# Altium PCB WS_LORA.PcbDoc (part 2 of 2)
Units mm, origin at the board's own origin, x right, y up, seen from the top; angles counter-clockwise.
Board outline 77.7 x 51.7 mm, 2 copper layers (Top Layer, Top, Bottom Layer, Bottom), stack 1.571 mm thick; 79 components, 51 nets, 236 pads, 108 vias.
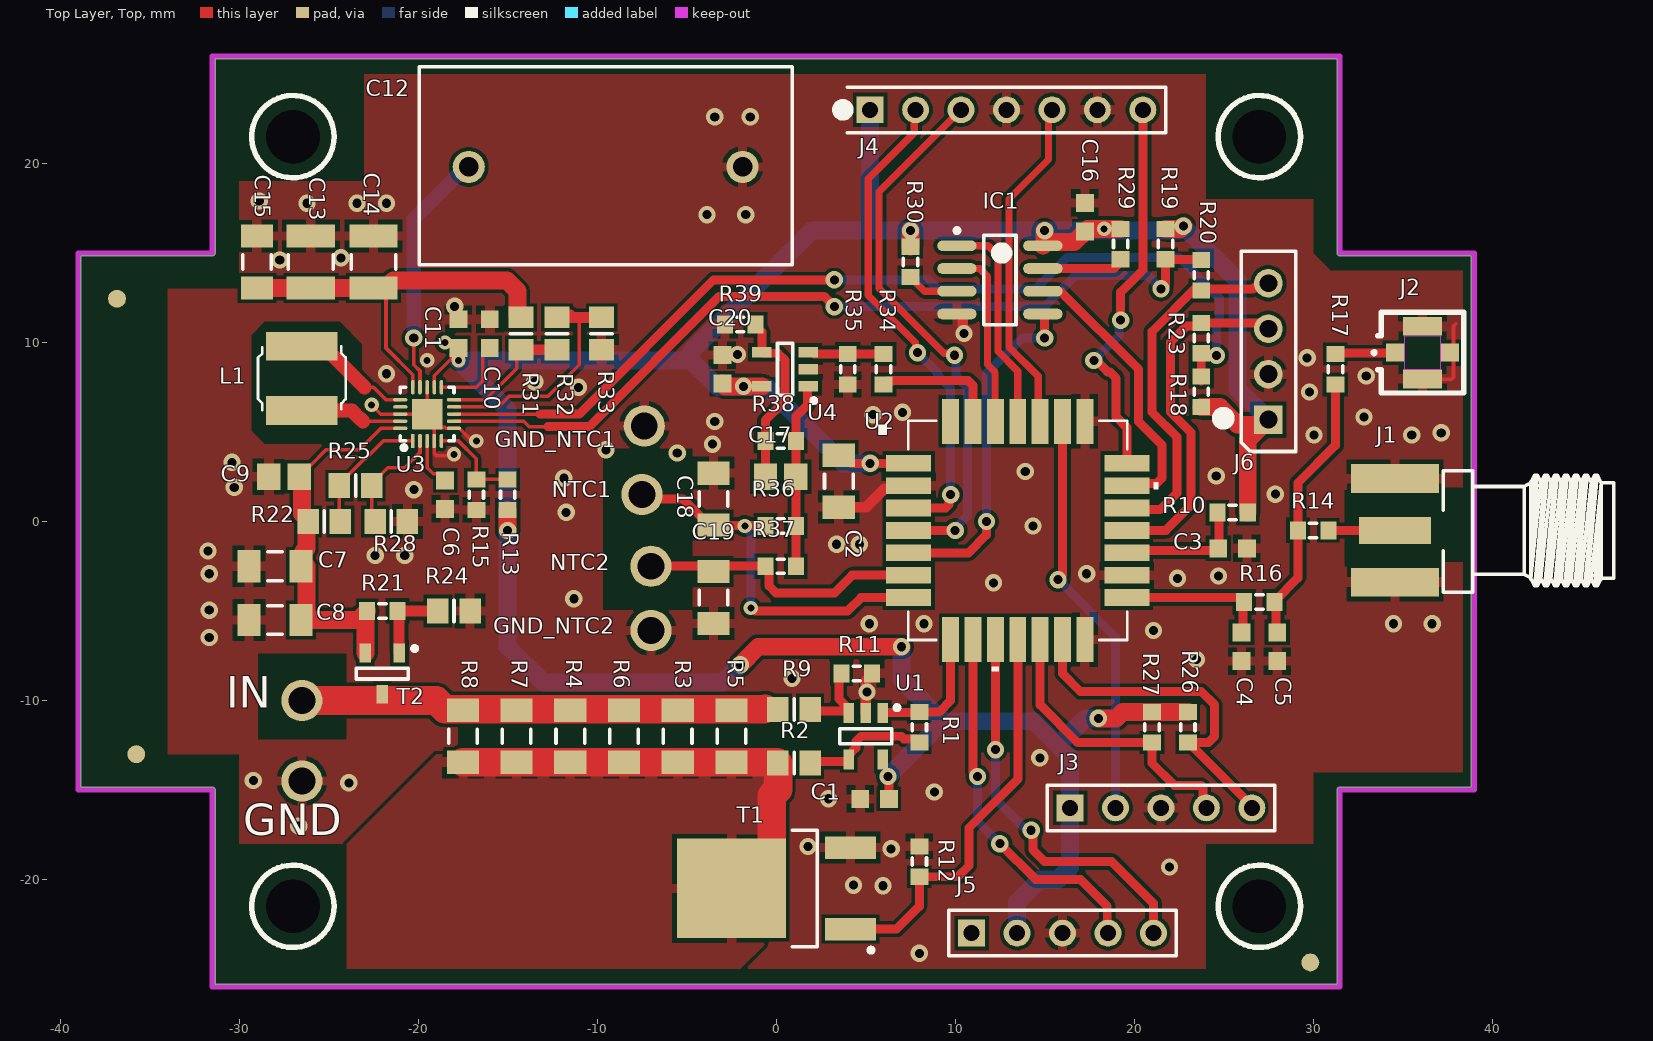
[diagram p0: Top Layer, Top view]

## Silkscreen, mask and mechanical layers (free items; w line width, h text height) (continued)
Mechanical 10: (continued)
  lines w0.2: -112.292,-141.115 -107.292,-141.115 ; -112.292,-85.715 -107.292,-85.715 ; -112.292,-30.315 -107.292,-30.315 ; -112.292,25.067 -107.292,25.067 ; -111.292,-141.115 -107.292,-141.115 ; -107.292,-190.975 -84.792,-190.975 ; -107.292,-179.895 -84.792,-179.895 ; -107.292,-174.355 -84.792,-174.355 ; -107.292,-168.815 72.708,-168.815 ; -107.292,-163.275 -17.292,-163.275 ; -107.292,-157.735 72.708,-157.735 ; -107.292,-152.195 -17.292,-152.195 ; -107.292,-146.655 72.708,-146.655 ; -103.25,-182.665 -87.057,-182.665 ; -100.504,-185.435 -107.292,-185.435 72.708,-185.435 ; -99.429,-185.191 -99.429,-180.032 ; -96.042,-196.515 -96.042,-190.975 -96.042,-185.435 ; -84.792,-146.655 -84.792,-196.515 ; -62.292,-168.815 -62.292,-146.655 ; -60.064,-200.515 -60.064,-196.515 ; -60.064,81.719 -60.064,85.719 ; -39.792,-168.815 -39.792,-146.655 ; -17.292,-190.975 72.708,-190.975 ; -17.292,-179.895 72.708,-179.895 ; -17.292,-174.355 72.708,-174.355 ; -17.292,-141.115 -17.292,-196.515 ; -10.064,-200.515 -10.064,-196.515 ; -10.064,81.719 -10.064,85.719 ; 2.708,-196.515 2.708,-174.355 ; 39.936,-200.515 39.936,-196.515 ; 39.936,81.719 39.936,85.719 ; 67.708,-196.515 67.708,-174.355 ; 72.708,-135.715 76.708,-135.715 ; 72.708,-125.715 74.708,-125.715 ; 72.708,-115.715 74.708,-115.715 ; 72.708,-105.715 74.708,-105.715 ; 72.708,-95.715 74.708,-95.715 ; 72.708,-75.715 74.708,-75.715 ; 72.708,-65.715 74.708,-65.715 ; 72.708,-55.715 74.708,-55.715 ; 72.708,-45.715 74.708,-45.715 ; 72.708,-35.715 76.708,-35.715 ; 72.708,25.085 76.708,25.085 ; 74.708,-135.715 74.708,-35.715 ; 76.708,-141.115 72.708,-141.115 ; 77.621,-57.781 86.938,-57.781 ; -117.292,-200.708 -117.292,-206.281 -111.718,-206.281 ; -117.292,-200.708 -111.718,-206.281 ; -117.292,-200.708 -117.292,85.413 ; -117.292,85.413 -111.986,90.719 ; -117.292,85.413 -117.292,90.719 -111.986,90.719 ; -111.986,90.719 86.938,90.719 ; -111.718,-206.281 86.674,-206.281 ; -107.292,-196.515 -107.292,81.719 72.708,81.719 72.708,-196.515 ; -107.292,-196.515 72.708,-196.515 ; -107.292,-196.515 -84.792,-196.515 ; -107.292,-196.515 72.708,-196.515 ; -107.292,-141.115 72.708,-141.115 ; -84.792,-196.515 -17.292,-196.515 ; -84.792,-196.515 -17.292,-196.515 ; 72.708,-196.515 72.708,-141.115 ; 86.674,-206.281 92.708,-206.281 92.708,-200.216 ; 86.674,-206.281 92.708,-200.216 ; 86.938,90.719 92.708,84.949 ; 86.938,90.719 92.708,90.719 92.708,84.949 ; 92.708,-200.216 92.708,84.949 ; -112.292,-200.515 76.708,-200.515 76.708,85.719 -112.292,85.719 -112.292,-200.515 ; -94.145,-184.915 -88.145,-183.665 -88.145,-181.665 -94.145,-180.415 -94.145,-184.915 ; 72.708,-85.715 76.708,-85.715 72.708,-85.715
  text "1" at 60.653,82.263 h5
  text "4" at -81.714,82.136 h5
  text "2" at 19.759,82.136 h5
  text "3" at -31.676,82.009 h5
  text "A" at -108.003,56.99 h5
  text "A" at 76.02,55.593 h5
  text "B" at -108.257,-0.922 h5
  text "10cm-Scale with caution as distortion can occur" at 73.861,-33.053 h2.3 r270
  text "C" at -108.257,-55.913 h5
  text "D" at -108.294,-110.434 h5
  text "general tolerances (SN EN 22768-1/-2): ISO 2768-mK" at 71.973,-144.858 h3.2
  text "Indrivetec AG  confidential" at -17.73,-146.186 h6
  text "Copying of this document and giving it to others and the use or communication of the contents" at 71.95,-149.299 h2.3
  text "replacement for:" at -85.41,-150.104 h3.2
  text "checked :" at -17.857,-150.273 h3.2
  text "thereof, are forbidden without express authority. Offenders are liable to the payment of damages." at 71.95,-151.799 h2.3
  text "All rights are reserved in the event of the a patent or the registration of a utility or design." at 71.95,-154.299 h2.3
  text "checked eng:" at -17.726,-155.735 h3.2
  text "Indrivetec AG" at 71.95,-156.799 h2.3
  text "Indrivetec AG" at 21.918,-161.069 h3.4
  text "checked  prod:" at -17.747,-161.242 h3.2
  text "scale:" at -85.41,-161.285 h3.2
  text "INDRIVETEC" at 71.575,-163.99 h6.5
  text "Hagenholzstrasse 71, CH-8050 Zürich" at 35.38,-164.244 h3.4
  text "drawn by:" at -17.778,-166.649 h3.2
  text "www.indrivetec.ch" at 24.585,-167.165 h3.4
  text "1:1" at -87.491,-167.469 h4.2
  text "Innovative Drive Technologies AG" at 71.702,-167.927 h2.6
  text "E" at -107.876,-168.054 h5
  text "E" at 75.893,-169.705 h5
  text "LK" at -45.53,-169.903 h5
  text "description:" at -17.79,-171.224 h3.2
  text "material:" at -85.417,-172.387 h3.2
  text "Subject to rectifying modification and amendments" at 71.111,-172.671 h3.2
  text "d" at 71.029,-177.991 h3.2
  text "EP-17-00**-AA-I-E-A" at -23.218,-178.07 h5
  text "c" at 70.95,-183.485 h3.2
  text "article number:" at -18.818,-184.07 h3.2
  text "000-0000-00" at -30.421,-184.613 h5
  text "b" at 70.969,-188.959 h3.2
  text "format:" at -85.179,-189.061 h3.2
  text "A4" at -100.636,-189.732 h4.2
  text "CAD-name:" at -23.318,-191.32 h3.2
  text "LSB / LSB - P  V5.1" at -36.64,-194.414 h5
  text "modification:" at 66.769,-194.507 h3.2
  text "page / of:" at -85.179,-194.517 h2.9
  text "name, date:" at 1.875,-194.521 h3.2
  text "1" at -99.367,-195.187 h4.2
  text "1" at -104.366,-195.229 h4.2
  text "/" at -102.303,-195.227 h4.2
  text "3" at -32.184,-199.931 h5
  text "2" at 17.6,-199.931 h5
  text "4" at -85.143,-200.058 h5
  text "1" at 60.145,-200.058 h5
Mechanical 11:
  circle w0.2: c74.631,-182.438 r2.25
  circle w0.2: c74.631,-182.438 r1
  lines w0.2: -111.737,-57.555 -102.42,-57.555 ; -101.506,-140.888 -97.506,-140.888 ; -101.506,-135.488 -97.506,-135.488 ; -101.506,-35.488 -97.506,-35.488 ; -101.506,25.312 -97.506,25.312 ; -99.506,-135.488 -99.506,-35.488 ; -99.506,-125.488 -97.506,-125.488 ; -99.506,-115.488 -97.506,-115.488 ; -99.506,-105.488 -97.506,-105.488 ; -99.506,-95.488 -97.506,-95.488 ; -99.506,-75.488 -97.506,-75.488 ; -99.506,-65.488 -97.506,-65.488 ; -99.506,-55.488 -97.506,-55.488 ; -99.506,-45.488 -97.506,-45.488 ; -97.507,-190.748 -7.507,-190.748 ; -97.507,-185.208 82.493,-185.208 75.705,-185.208 ; -97.507,-179.668 -7.507,-179.668 ; -97.507,-174.128 -7.507,-174.128 ; -97.507,-168.588 82.493,-168.588 ; -97.507,-157.508 82.493,-157.508 ; -97.507,-146.428 82.493,-146.428 ; -92.507,-196.288 -92.507,-174.128 ; -64.735,-200.288 -64.735,-196.288 ; -64.735,81.945 -64.735,85.945 ; -27.507,-196.288 -27.507,-174.128 ; -14.735,-200.288 -14.735,-196.288 ; -14.735,81.945 -14.735,85.945 ; -7.507,-163.048 82.493,-163.048 ; -7.507,-151.968 82.493,-151.968 ; -7.507,-140.888 -7.507,-196.288 ; 14.993,-168.588 14.993,-146.428 ; 35.265,-200.288 35.265,-196.288 ; 35.265,81.945 35.265,85.945 ; 37.493,-168.588 37.493,-146.428 ; 59.993,-190.748 82.493,-190.748 ; 59.993,-179.668 82.493,-179.668 ; 59.993,-174.128 82.493,-174.128 ; 59.993,-146.428 59.993,-196.288 ; 62.259,-182.438 78.452,-182.438 ; 71.243,-196.288 71.243,-190.748 71.243,-185.208 ; 74.631,-184.964 74.631,-179.806 ; 82.493,-85.488 87.493,-85.488 ; 82.493,-30.088 87.493,-30.088 ; 82.493,25.294 87.493,25.294 ; 86.493,-140.888 82.493,-140.888 ; 87.493,-140.888 82.493,-140.888 ; -117.506,-199.989 -117.506,85.175 ; -117.506,-199.989 -111.472,-206.055 ; -117.506,-199.989 -117.506,-206.055 -111.472,-206.055 ; -117.506,85.175 -117.506,90.945 -111.737,90.945 ; -117.506,85.175 -111.737,90.945 ; -111.737,90.945 87.188,90.945 ; -111.472,-206.055 86.92,-206.055 ; -97.506,-196.288 -97.506,81.945 82.493,81.945 82.493,-196.288 ; -97.506,-196.288 82.493,-196.288 ; -97.507,-196.288 -97.507,-140.888 ; -97.507,-196.288 82.493,-196.288 ; -97.507,-140.888 82.493,-140.888 ; -7.506,-196.288 59.994,-196.288 ; -7.507,-196.288 59.993,-196.288 ; 59.994,-196.288 82.493,-196.288 ; 86.92,-206.055 92.493,-200.481 ; 86.92,-206.055 92.493,-206.055 92.493,-200.481 ; 87.188,90.945 92.493,90.945 92.493,85.64 ; 87.188,90.945 92.493,85.64 ; 92.493,-200.481 92.493,85.64 ; -101.506,-200.288 87.493,-200.288 87.493,85.945 -101.506,85.945 -101.506,-200.288 ; -101.506,-85.488 -97.506,-85.488 -101.506,-85.488 ; 63.347,-183.438 63.347,-181.438 69.347,-180.188 69.347,-184.688 63.347,-183.438
  text "1" at -85.452,82.489 h5
  text "2" at -44.558,82.362 h5
  text "4" at 56.915,82.362 h5
  text "3" at 6.877,82.235 h5
  text "A" at 83.204,57.216 h5
  text "A" at -100.819,55.819 h5
  text "B" at 83.458,-0.696 h5
  text "10cm-Scale with caution as distortion can occur" at -98.66,-32.827 h2.3 r90
  text "C" at 83.458,-55.687 h5
  text "D" at 83.496,-110.208 h5
  text "general tolerances (SN EN 22768-1/-2): ISO 2768-mK" at -96.771,-144.631 h3.2
  text "Indrivetec AG  confidential" at -7.068,-145.959 h6
  text "Copying of this document and giving it to others and the use or communication of the contents" at -96.749,-149.073 h2.3
  text "replacement for:" at 60.612,-149.878 h3.2
  text "checked :" at -6.941,-150.046 h3.2
  text "thereof, are forbidden without express authority. Offenders are liable to the payment of damages." at -96.749,-151.573 h2.3
  text "All rights are reserved in the event of the a patent or the registration of a utility or design." at -96.749,-154.073 h2.3
  text "checked eng:" at -7.072,-155.508 h3.2
  text "Indrivetec AG" at -96.749,-156.573 h2.3
  text "Indrivetec AG" at -46.717,-160.843 h3.4
  text "checked  prod:" at -7.051,-161.015 h3.2
  text "scale:" at 60.612,-161.059 h3.2
  text "INDRIVETEC" at -96.374,-163.764 h6.5
  text "Hagenholzstrasse 71, CH-8050 Zürich" at -60.179,-164.018 h3.4
  text "drawn by:" at -7.02,-166.422 h3.2
  text "www.indrivetec.ch" at -49.384,-166.939 h3.4
  text "1:1" at 62.693,-167.242 h4.2
  text "Innovative Drive Technologies AG" at -96.501,-167.701 h2.6
  text "E" at 83.077,-167.828 h5
  text "LK" at -2.717,-169.208 h5
  text "E" at -100.692,-169.479 h5
  text "description:" at -7.008,-170.998 h3.2
  text "material:" at 60.618,-172.161 h3.2
  text "Subject to rectifying modification and amendments" at -95.91,-172.445 h3.2
  text "d" at -95.827,-177.764 h3.2
  text "EP-17-00**-AA-I-E-A" at -1.581,-177.844 h5
  text "c" at -95.749,-183.258 h3.2
  text "article number:" at -5.981,-183.844 h3.2
  text "000-0000-00" at 9.169,-183.844 h5
  text "b" at -95.768,-188.732 h3.2
  text "format:" at 60.38,-188.835 h3.2
  text "A4" at 75.838,-189.505 h4.2
  text "CAD-name:" at -1.481,-191.094 h3.2
  text "LSB / LSB - P  V5.1" at 6.173,-193.719 h5
  text "modification:" at -91.567,-194.28 h3.2
  text "name, date:" at -26.673,-194.295 h3.2
  text "page / of:" at 60.38,-194.29 h2.9
  text "1" at 74.569,-194.961 h4.2
  text "/" at 77.505,-195 h4.2
  text "1" at 79.568,-195.003 h4.2
  text "2" at -42.399,-199.705 h5
  text "3" at 7.385,-199.705 h5
  text "1" at -84.944,-199.832 h5
  text "4" at 60.344,-199.832 h5

## Text inside footprints (layer, text, board x,y; h text height)
U2: Mechanical 13 "*" at 8.344,3.24 h1.27